# Altium PCB PCB2.PcbDoc
Units mm, origin at the board's own origin, x right, y up, seen from the top; angles counter-clockwise.
Board outline 100.58 x 66.29 mm, 4 copper layers (Top Layer, Int1 (GND), Int2 (PWR), Bottom Layer), stack 1.369 mm thick; 11 components, 2 nets, 24 pads, 2 vias.
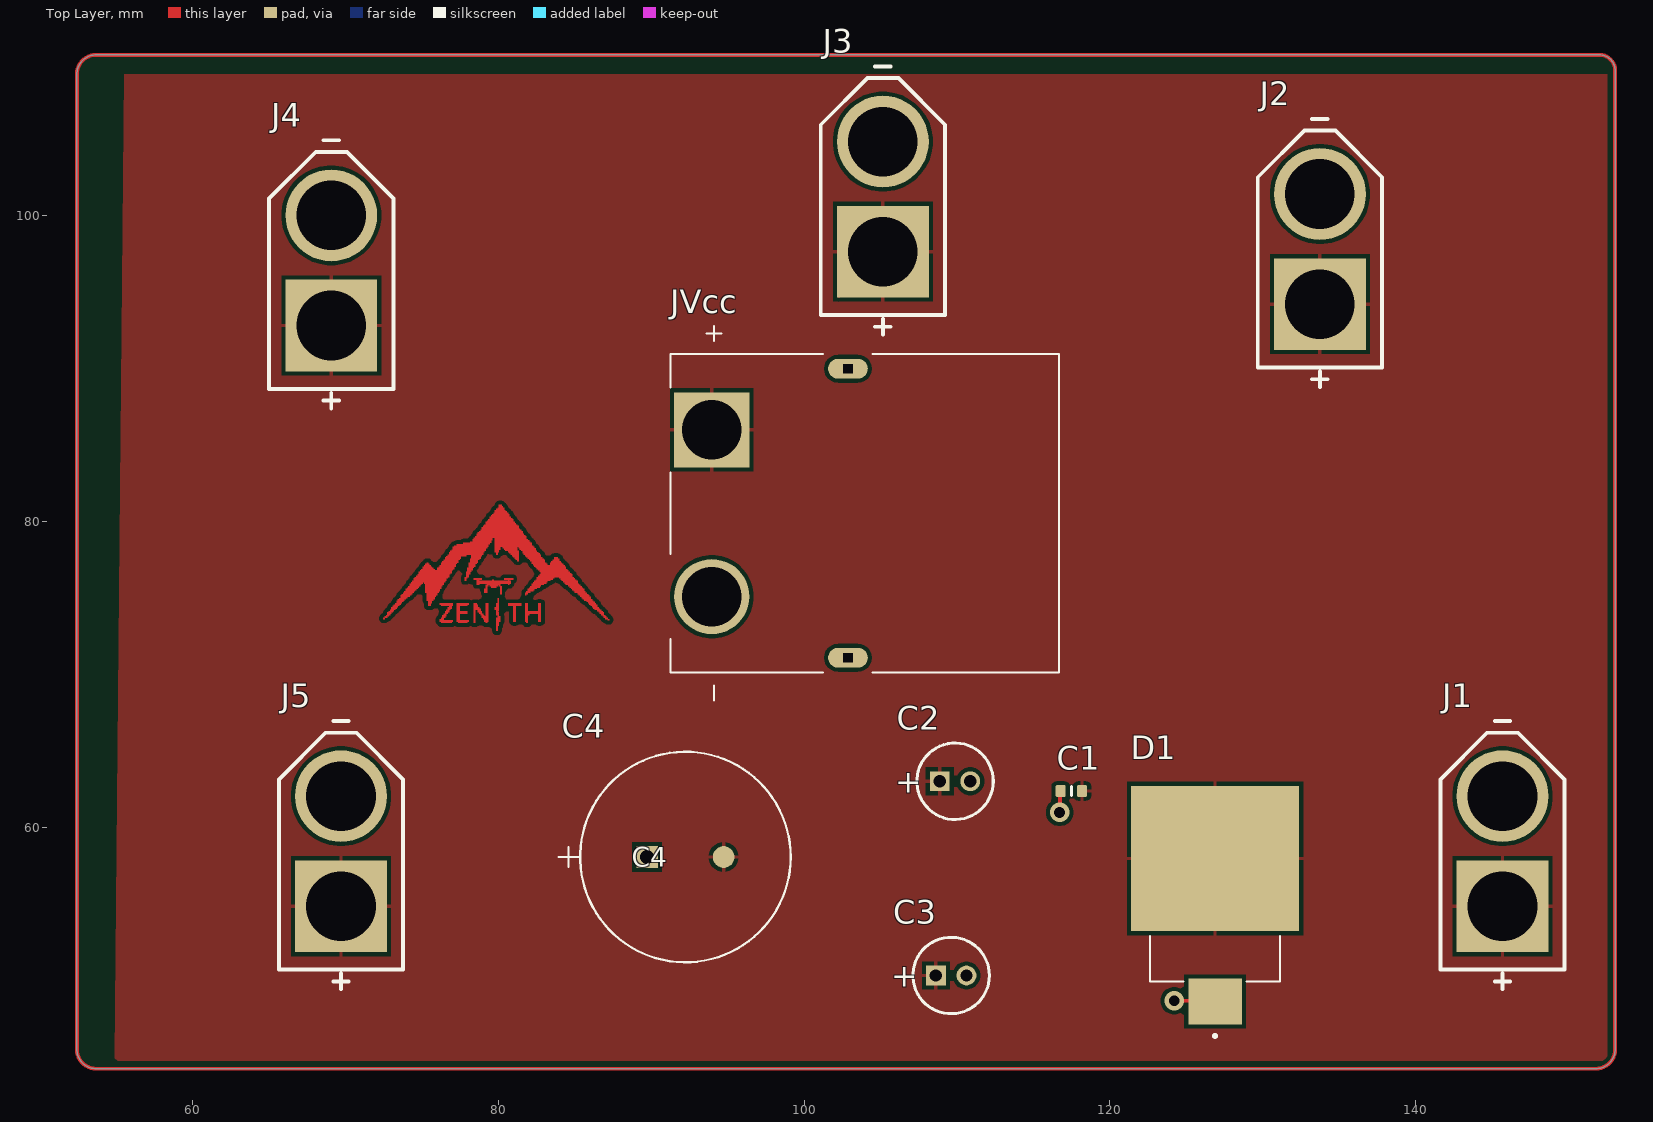
[diagram p0: Top Layer view]
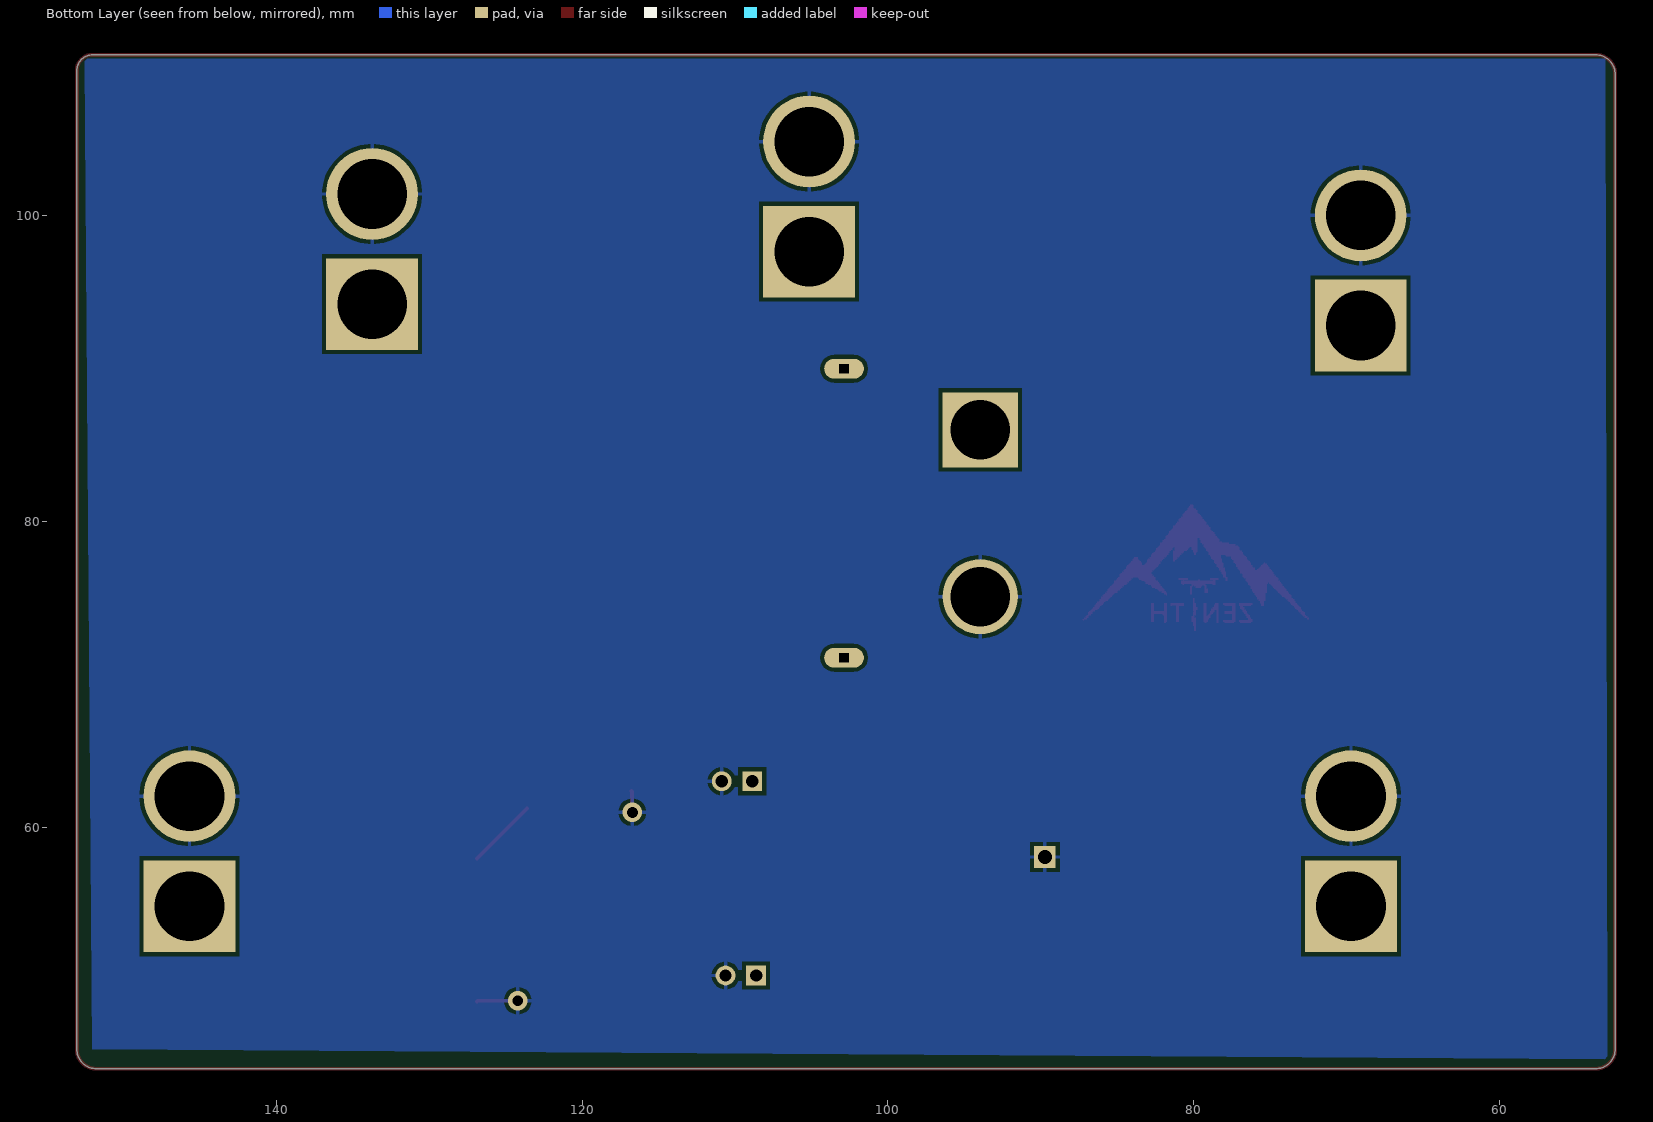
[diagram p1: Bottom Layer view, seen from below]
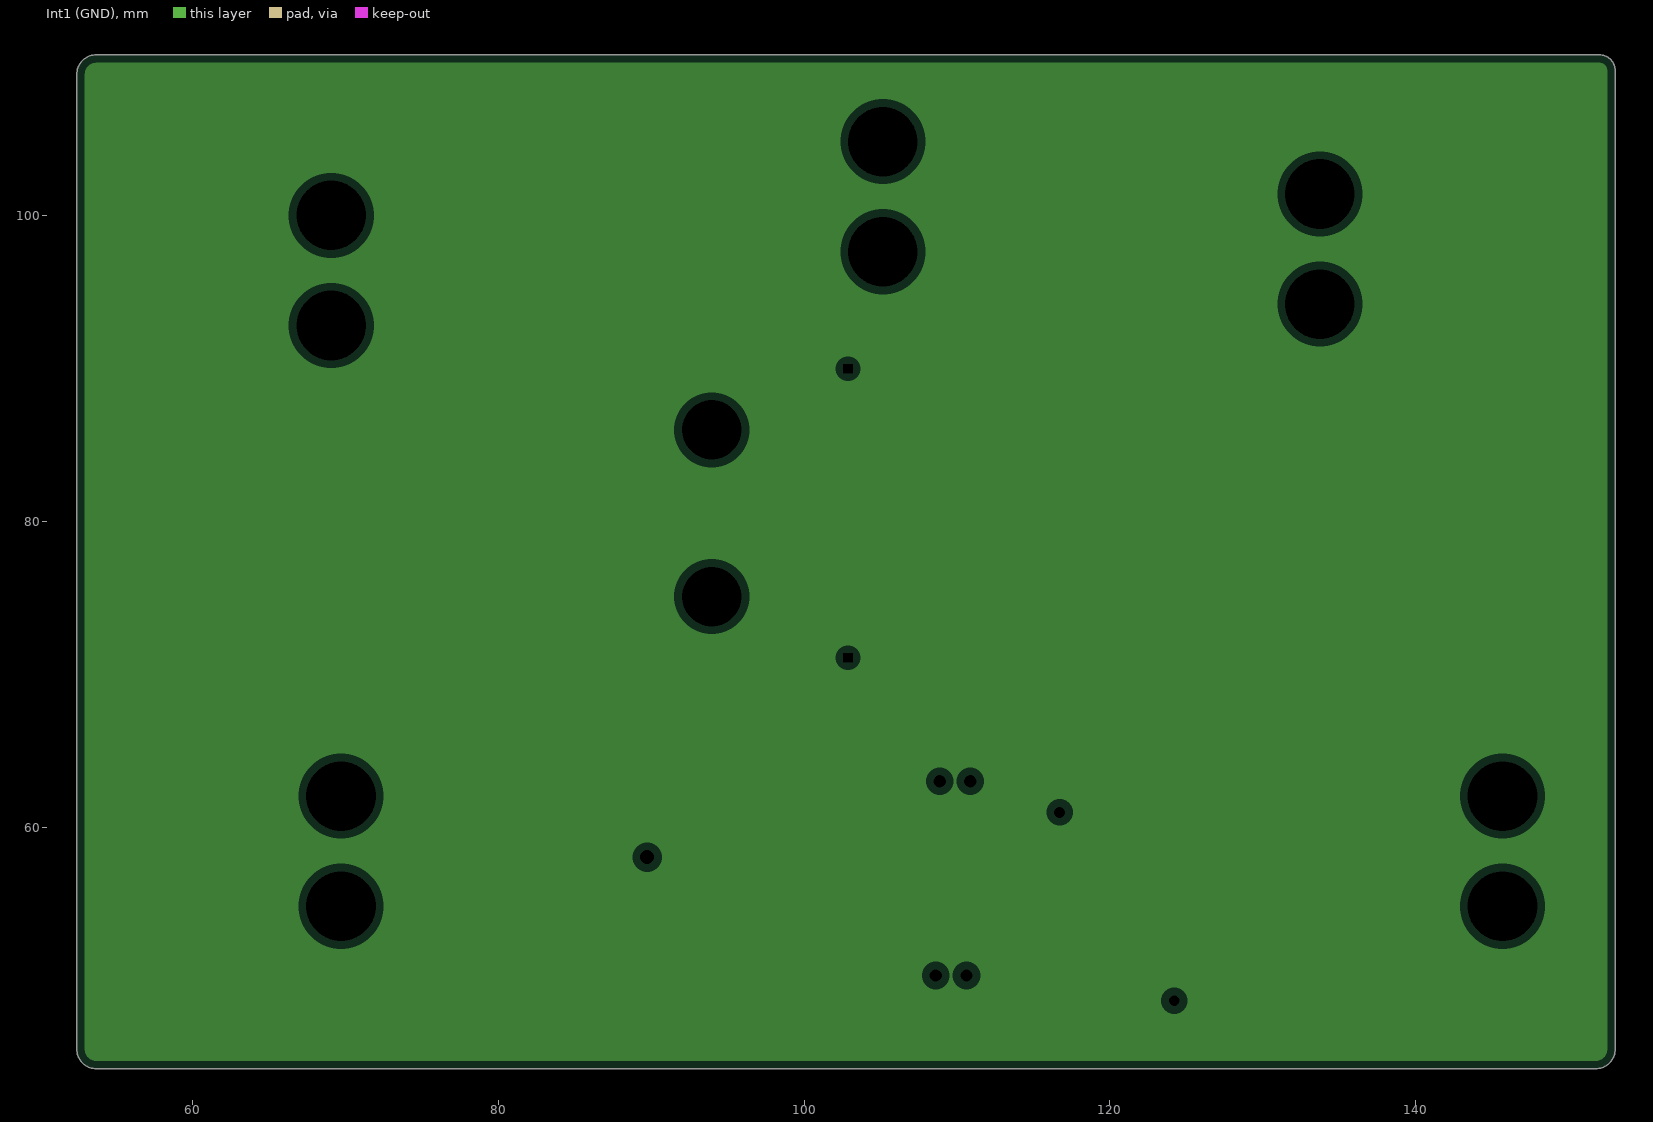
[diagram p2: Int1 (GND), clearances drawn from the general rule]
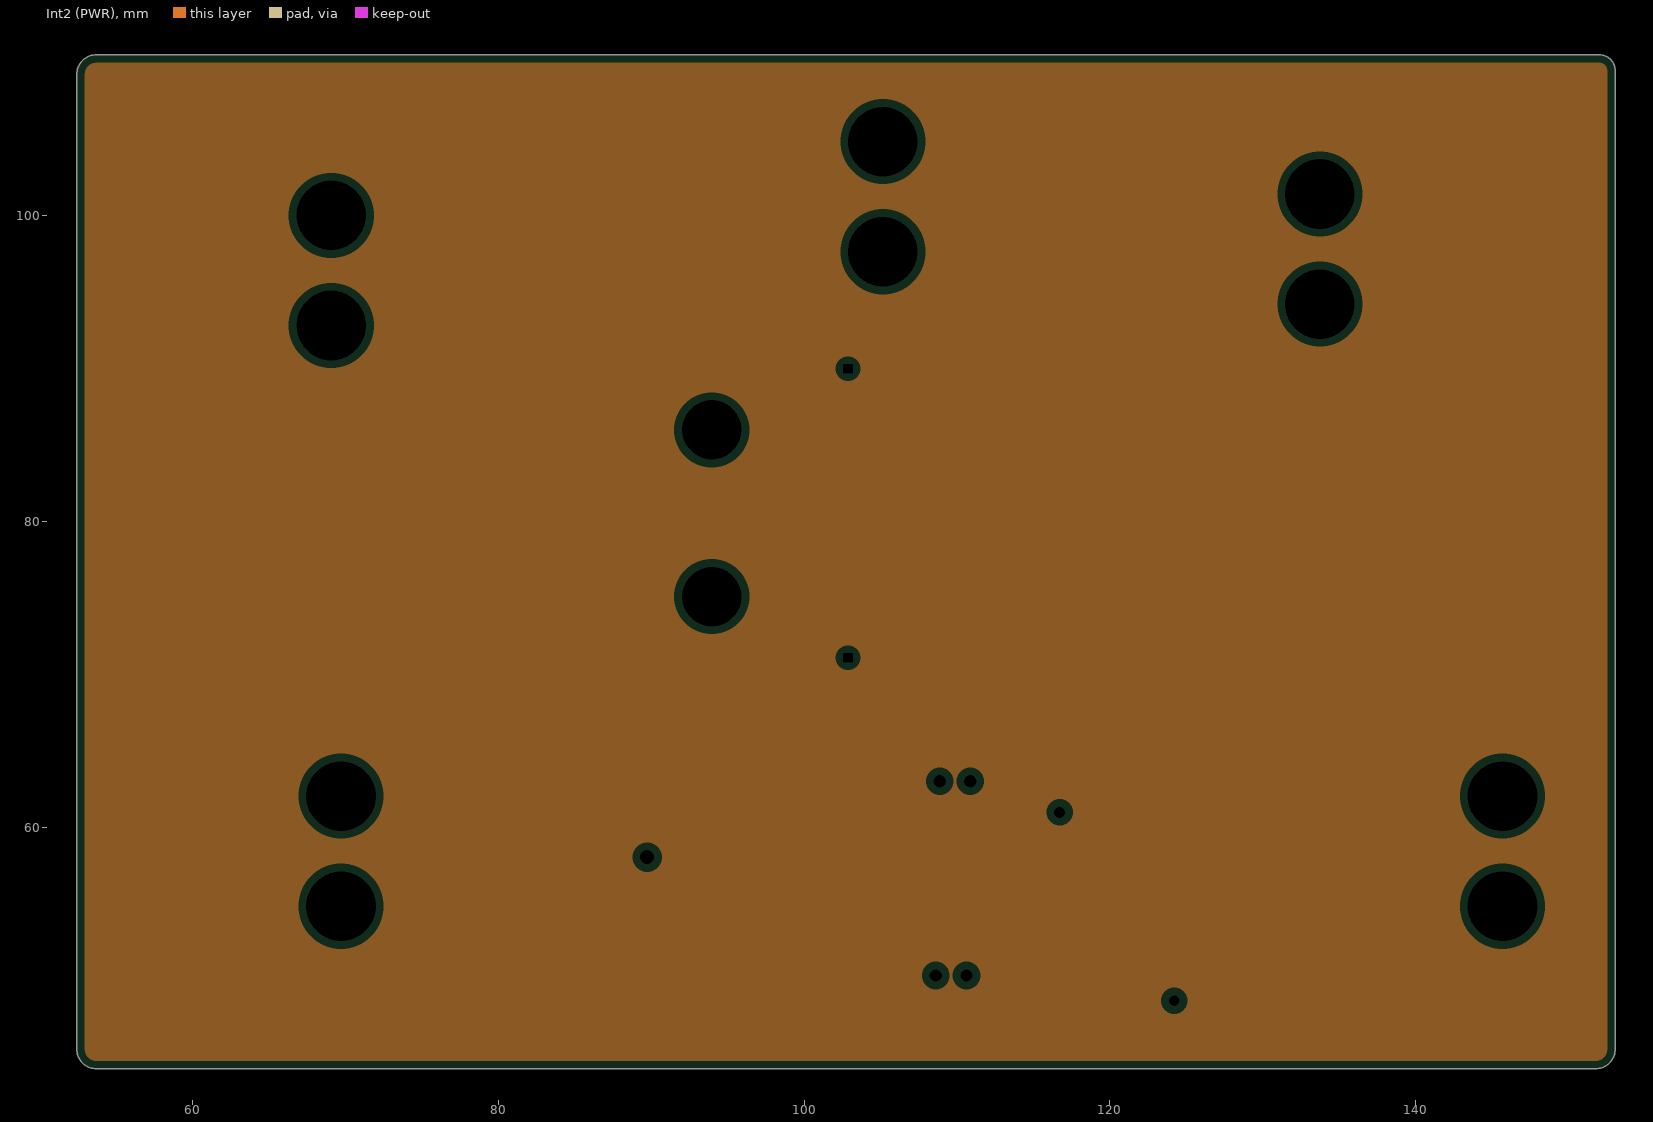
[diagram p3: Int2 (PWR), clearances drawn from the general rule]
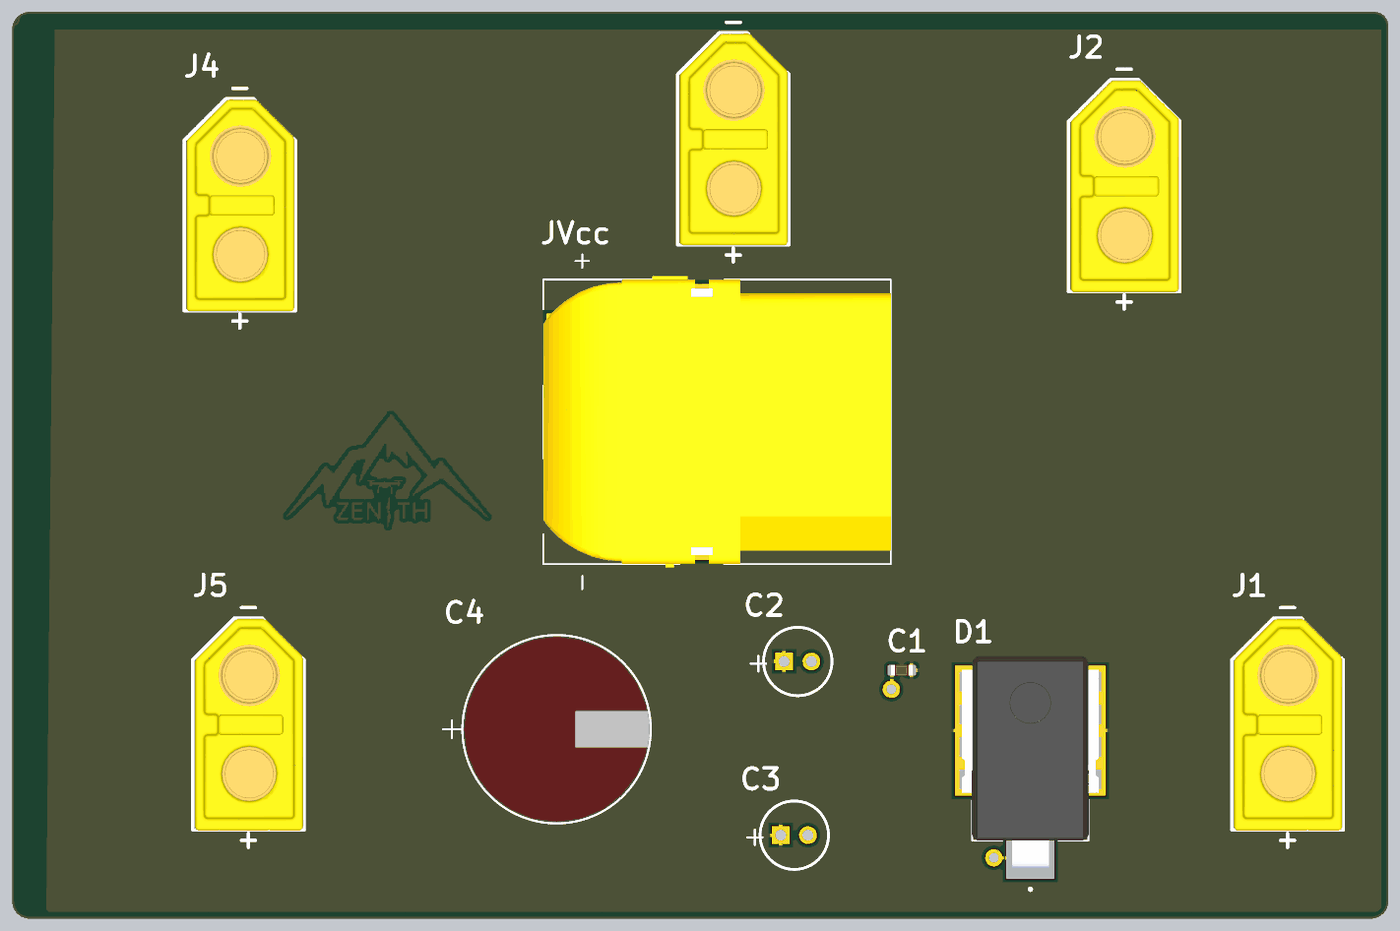
[diagram p4: 3D render of the assembled board from above, using the file's embedded part models]

## Layer stack, top to bottom
Top Solder: solder mask 0.0254, SM-001, Dk 4
Top Layer: signal copper 0.035
Dielectric 1: prepreg 0.1295, PP-017, Dk 4.3
Dielectric 2: prepreg 0.1295, PP-017, Dk 4.3
Int1 (GND): plane copper 0.035
Dielectric 3: core 0.7112, Core-039, Dk 4.8
Int2 (PWR): plane copper 0.035
Dielectric 4: prepreg 0.1295, PP-017, Dk 4.3
Dielectric 5: prepreg 0.1295, PP-017, Dk 4.3
Bottom Layer: signal copper 0.035
Bottom Solder: solder mask 0.0254, SM-001, Dk 4

## Board outline
52.451,45.466 52.451,109.22 cw(c53.721,109.22) 53.721,110.49 152.019,110.49 cw(c152.019,109.474) 153.035,109.474 153.035,45.466 cw(c151.765,45.466) 151.765,44.196 53.721,44.196 cw(c53.721,45.466)

## Design rules (kind name [scope] priority, off if disabled: settings)
Clearance [All] p1: gap=0.254 ignorepadtopadclearanceinfootprint=TRUE
PlaneClearance [All] p1: clearance=0.508
PlaneConnect [All] p1: planeconnectstyle=Relief reliefexpansion=0.508 reliefentries=4 reliefconductorwidth=0.254 reliefairgap=0.254
PolygonConnect [All] p1: connectstyle=Relief reliefconductorwidth=0.254 reliefentries=4 polygonreliefangle="90 Angle" airgapwidth=0.254
RoutingVias [All] p1: holewidth=0.711 width=1.27 viastyle="Through Hole" minholewidth=0.711 minwidth=1.27 maxholewidth=0.711 maxwidth=1.27
SolderMaskExpansion [All] p1: expansion=0.102 istentingtop=FALSE
SupplyNets "Schematic Supply Nets" [InNet('GND')] p1: voltage=0.000
Width [All] p1: maxlimit=0.254 minlimit=0.254 preferedwidth=0.254
28 further rules are at their usual default settings.

## Classes and differential pairs
component class PDB_OS3_connections: C1 C2 C3 D1 J1 J2 J3 J4 J5 JVcc

## Components (designator, comment, footprint, x,y, rotation, side; value= is the part's Value field where it differs from the comment)
C1 "Capacitor 1µF +/-40% 50V 0603" CAPC0603(1608)100_L 117.475,62.357 r0 top value=1µF
C2 "ECA1HM220" CAPPR55-200-1100X500X1200 109.871,62.992 r0 top value=22µF
C3 "ECA1HM220" CAPPR55-200-1100X500X1200 109.617,50.292 r0 top value=22µF
C4 "680 uF" CAP_PY-13x20_KEM 89.742,58.039 r0 top
D1 "58.1 V 2800 W" TVSP_TLD8S36AH 126.873,56.642 r90 top
J1 "XT60PB-F" XT60PB-F 145.669,58.42 r0 top
J2 "XT60PB-F" XT60PB-F 133.731,97.79 r0 top
J3 "XT60PB-F" XT60PB-F 105.156,101.219 r0 top
J4 "XT60PB-F" XT60PB-F 69.088,96.393 r0 top
J5 "XT60PB-F" XT60PB-F 69.723,58.42 r0 top
JVcc "XT90PW-F" AMASS_XT90PW-F 102.87,80.518 r90 top

## Footprints (in the part's own frame and the unit in brackets; to place one, negate y for a bottom-side part, rotate by r counter-clockwise, add the part's x,y. Pads: shape width x height; smd on the part's side, far side on the other; paste and mask are expansions set on the pad)
AMASS_XT90PW-F [mm]
  round 4.916 hole 3.9: N(-5.45,8.9)
  rect 4.916x4.916 / inner round 4.916 / far side rect 4.916x4.916 hole 3.9: P(5.45,8.9)
  oval 1.3x2.6 hole 0.6 square: S1(9.45,0) S2(-9.45,0)
  silkscreen extent -12.25,-13.8 12.25,11.6, body extent -10.65,-13.8 10.65,11.6, height 10.3
CAP_PY-13x20_KEM [mil]
  rect 56x56 hole 36 paste-99999 mask+0: 1(0,0)
  round 56 smd paste-99999 mask+0: 332(196.85,0)
  silkscreen extent -228,-271 369,271, body extent -168,-266 366,266, height 857
CAPC0603(1608)100_L [mm] "Chip Capacitor, Body 1.6x0.8mm, Height 1.0mm, IPC High Density"
  rrect25% 0.66x0.76 smd: 1(-0.7,0) 2(0.7,0)
  silkscreen extent 0,-0.3 0,0.3, body extent -0.8,-0.4 0.8,0.4, height 0.95
CAPPR55-200-1100X500X1200 [mm] "THD, 2-Leads, Dia 5mm, Pin Spacing 2mm"
  rect 1.3x1.3 hole 0.8: 1(-1,0)
  round 1.3 hole 0.8: 2(1,0)
  silkscreen extent -2.5,-2.5 2.5,2.5, body extent -2.5,-2.5 2.45,2.5, height 12
TVSP_TLD8S36AH [mm]
  rect 9.5x11 smd paste-7: A(1.3,0)
  rect 3x3.5 smd: C(-8.05,0)
  silkscreen extent -10.4,-4.25 -3.77,4.25, body extent -8.75,-5 6.75,5, height 5.5
XT60PB-F [mm] "Connector"
  round 6 hole 4.55: N(0,3.6)
  rect 6x6 / inner round 6 / far side rect 6x6 hole 4.55: P(0,-3.6)
  silkscreen extent -4.06,-9.02 4.06,8.51, body extent -3.9,-7.8 4,7.7, height 16.69

## Part data
C1: library part CMP-001-00078-4, "Chip Capacitor, 1µF +/-40%, 50V, 0603, Thickness 1 mm", Case/Package=0603, Max Operating Temperature=85°C, Min Operating Temperature=-55°C, Tolerance=10%, Voltage Rating=50V, Mounting Technology=SMT, Pins=2
C2 C3: library part CMP-001-00027-7, "Aluminum Electrolytic Capacitor, 22 uF, +/- 20%, 50 V, -40 to 85 degC, 2-Pin THD, RoHS, Bulk", Capacitor Type=Electrolytic, Case/Package=Radial, Manufacturer=Panasonic, Max Operating Temperature=85°C, Min Operating Temperature=-40°C, Package Description="2-Pin Radial Lead, Dia 5 mm, Height 12 mm", Package Quantity=200, Package Reference=CAPPR55-200-1100X500X1200, Ripple Current=100mA, Tolerance=20%, Voltage Rating=50V, Datasheet URL=https://industrial.panasonic.com/cdbs/www-data/pdf/RDF0000/ABA0000C1218.pdf, Datasheet Version="Rev. 05, 10/2016", Diameter=5mm, Lead Pitch=2mm, Manufacturer URL=http://www.panasonic.com/, Mounting Technology=TH, Packaging=Bulk, Pins=2, Ripple Current (AC)=100mA, RoHS Compliant=True
C4: library part CAP_PY-13x20_KEM, "680 uF Capacitor Through Hole", ComponentLink1Description="Manufacturer Link", ComponentLink1URL=https://www.digikey.ca/fr/products/detail/kemet/A759PY687M1HAAE026/6196519?s=N4IgjCBcoEwAwBYCcVQGMoDMCGAbAzgKYA0IA9lANogBsAHHAAQCtAYiALqkAOALlCACqAOwCWvAPKYAsoWz4ArgCdCIAL6l4AdhTQQGSDgIlyVEAFYmANU49%2BkIWMky5iletIBaGKn1ReSgomFJDU5pxqGiA%2BofrY3Nho4mRKEUA
D1: library part TVSP_TLD8S36AH, "Diode TVS 2800 W Unidirectionnelle", ComponentLink1Description="Manufacturer Link", ComponentLink1URL=https://www.digikey.ca/en/products/detail/taiwan-semiconductor-corporation/TLD5S36AH/9659228
J1 J2 J3 J4 J5: "Connector", ComponentLink1Description=Datasheet, ComponentLink1URL=https://www.tme.com/Document/aa7a0328674fda4109d00dc748bb5162/XT60UPB-F.pdf
JVcc: "Socket, DC supply, XT90, female, PIN:2, on PCBs, THT", Package=Package, Check_prices=https://www.snapeda.com/parts/XT90PW-F/AMASS/view-part/?ref=eda, MF=AMASS, MP=XT90PW-F, SnapEDA_Link=https://www.snapeda.com/parts/XT90PW-F/AMASS/view-part/?ref=snap

## Via types
v1: diameter 1.27, hole 0.711, Top Layer to Bottom Layer, 2 vias

## Nets (pads, with @x,y where several pads share a name; then routed paths per layer and width w, separated by ;. In a path a pad name is that pad's centre, name@x,y a point inside that pad or via, vN(x,y) a via of type N, cw(c..) or ccw(c..) an arc to the next point about the centre after c; other vN are vias at no path point)
GND: C1.1 C2.2 C3.2 C4.1 D1.C J1.N J2.N J3.N J4.N J5.N JVcc.N | length 4.4
  Top Layer w0.254: v1(116.713,60.96) 116.744,60.991 116.744,62.326 C1.1 ; v1(124.206,48.641) 126.824,48.641 D1.C
  Bottom Layer w0.254: J5.N J5.N@69.954,61.789
NetC1_2: C1.2 C2.1 C3.1 C4.332 D1.A J1.P J2.P J3.P J4.P J5.P JVcc.P | length 8.7
  Top Layer w0.254: J3.P@102.283,94.746 J3.P ; D1.A@123.601,61.214 D1.A
pads on no net: JVcc.S1 JVcc.S2
copper on no net: | length 331.7
  Top Layer w0.254: 52.451,45.466 ccw(c53.721,45.466) 53.721,44.196 151.765,44.196 ccw(c151.765,45.466) 153.035,45.466 153.035,109.474 ccw(c152.019,109.474) 152.019,110.49 72.39,110.49 53.721,110.49 ccw(c53.721,109.22) 52.451,109.22 52.451,45.466

## Polygon pours and split planes (outlines as drawn)
GND on Bottom Layer "GND Grid" (solid, pour order 1): 53.085,110.236 152.527,110.236 152.019,45.466 52.959,44.831
NetC1_2 on Top Layer "Power Grid" (solid, pour order 0): 55.561,109.22 152.527,109.22 152.527,44.704 54.943,44.704
no net on Int2 (PWR) (split plane): 53.721,109.98 152.019,109.98 152.031,109.981 152.118,109.972 152.213,109.943 152.301,109.896 152.378,109.833 152.441,109.756 152.488,109.668 152.517,109.573 152.526,109.486 152.525,109.474 152.525,45.466 152.526,45.453 152.517,45.347 152.49,45.231 152.444,45.12 152.381,45.018 152.304,44.927 152.213,44.85 152.111,44.787 152,44.741 151.884,44.714 151.778,44.705 151.765,44.706 53.721,44.706 53.708,44.705 53.602,44.714 53.486,44.741 53.375,44.787 53.273,44.85 53.182,44.927 53.105,45.018 53.042,45.12 52.996,45.231 52.969,45.347 52.96,45.453 52.961,45.466 52.961,109.22 52.96,109.233 52.969,109.339 52.996,109.455 53.042,109.566 53.105,109.668 53.182,109.759 53.273,109.836 53.375,109.899 53.486,109.945 53.602,109.972 53.708,109.981
no net on Int1 (GND) (split plane): 53.721,109.98 152.019,109.98 152.031,109.981 152.118,109.972 152.213,109.943 152.301,109.896 152.378,109.833 152.441,109.756 152.488,109.668 152.517,109.573 152.526,109.486 152.525,109.474 152.525,45.466 152.526,45.453 152.517,45.347 152.49,45.231 152.444,45.12 152.381,45.018 152.304,44.927 152.213,44.85 152.111,44.787 152,44.741 151.884,44.714 151.778,44.705 151.765,44.706 53.721,44.706 53.708,44.705 53.602,44.714 53.486,44.741 53.375,44.787 53.273,44.85 53.182,44.927 53.105,45.018 53.042,45.12 52.996,45.231 52.969,45.347 52.96,45.453 52.961,45.466 52.961,109.22 52.96,109.233 52.969,109.339 52.996,109.455 53.042,109.566 53.105,109.668 53.182,109.759 53.273,109.836 53.375,109.899 53.486,109.945 53.602,109.972 53.708,109.981

## Other copper
Top Layer:
  region: 72.499,73.685 72.585,73.685 72.585,73.6 72.499,73.6
  region: 87.168,73.514 87.168,73.6 87.254,73.6 87.254,73.514
  region: 82.793,73.6 82.793,73.428 82.621,73.428 82.621,73.943 82.021,73.943 82.021,73.857 81.935,73.857 81.935,73.342 81.849,73.342 81.849,73.428 81.764,73.428 81.764,74.629 81.935,74.629 81.935,74.114 82.621,74.114 82.621,74.629 82.793,74.629 82.793,73.685
  region: 76.445,73.514 77.045,73.514 77.045,73.428 76.96,73.428 76.96,73.342 76.273,73.342 76.273,73.428 76.188,73.428 76.188,73.6 76.273,73.6 76.273,73.685 76.359,73.685 76.359,73.857 76.445,73.857 76.445,73.943 76.531,73.943 76.531,74.114 76.616,74.114 76.616,74.2 76.702,74.2 76.702,74.372 76.788,74.372 76.788,74.457 76.273,74.457 76.273,74.543 76.188,74.543 76.188,74.629 77.045,74.629 77.045,74.457 76.96,74.457 76.96,74.286 76.874,74.286 76.874,74.2 76.788,74.2 76.788,74.029 76.702,74.029 76.702,73.943 76.616,73.943 76.616,73.771 76.531,73.771 76.531,73.685 76.445,73.685 76.445,73.6
  region: 81.42,74.457 81.163,74.457 81.163,73.428 80.991,73.428 80.991,74.457 80.648,74.457 80.648,74.629 81.506,74.629 81.506,74.457
  region: 80.648,75.83 80.648,75.916 80.134,75.916 80.134,75.744 80.048,75.744 80.048,75.83 79.962,75.83 79.962,75.744 79.876,75.744 79.876,75.658 79.533,75.658 79.533,75.744 79.447,75.744 79.447,75.83 79.362,75.83 79.362,75.744 79.276,75.744 79.276,75.315 79.104,75.315 79.104,75.573 79.19,75.573 79.19,75.83 79.276,75.83 79.276,75.916 78.761,75.916 78.761,75.83 78.59,75.83 78.59,76.173 78.418,76.173 78.418,76.259 78.933,76.259 78.933,76.173 78.761,76.173 78.761,76.087 79.619,76.087 79.619,76.173 79.705,76.173 79.705,76.087 80.648,76.087 80.648,76.173 80.391,76.173 80.391,76.259 80.991,76.259 80.991,76.173 80.734,76.173 80.734,76.087 80.82,76.087 80.82,75.916 80.734,75.916 80.734,75.83
  region: 79.962,73.171 79.962,72.828 79.876,72.828 79.876,73.685 79.962,73.685 79.962,73.857 79.876,73.857 79.876,74.2 79.791,74.2 79.791,74.372 79.876,74.372 79.876,74.629 79.962,74.629 79.962,74.972 80.048,74.972 80.048,74.114 79.962,74.114 79.962,74.029 80.048,74.029 80.048,73.771 80.134,73.771 80.134,73.428 80.048,73.428 80.048,73.171
  region: 80.134,75.401 80.134,75.744 80.219,75.744 80.219,75.23 80.134,75.23 80.134,75.315
  region: 669 vertices and 0 holes, not listed, extent 72.585,73.6 87.168,81.063
  region: 77.732,74.114 77.989,74.114 77.989,73.943 77.474,73.943 77.474,73.514 78.075,73.514 78.075,73.428 77.989,73.428 77.989,73.342 77.389,73.342 77.389,73.428 77.303,73.428 77.303,74.629 78.075,74.629 78.075,74.543 77.989,74.543 77.989,74.457 77.474,74.457 77.474,74.114 77.646,74.114
  region: 79.104,73.771 79.19,73.771 79.19,74.629 79.362,74.629 79.362,73.428 79.276,73.428 79.276,73.342 79.19,73.342 79.19,73.428 79.104,73.428 79.104,73.6 79.018,73.6 79.018,73.685 78.933,73.685 78.933,73.857 78.847,73.857 78.847,73.943 78.761,73.943 78.761,74.029 78.675,74.029 78.675,74.2 78.504,74.2 78.504,73.342 78.418,73.342 78.418,74.629 78.59,74.629 78.59,74.543 78.675,74.543 78.675,74.372 78.761,74.372 78.761,74.286 78.847,74.286 78.847,74.114 78.933,74.114 78.933,73.943 79.018,73.943 79.018,73.857 79.104,73.857

## Dimensions
49.276,110.236 to 49.276,59.944 on Top Layer
52.07,114.935 to 112.522,115.57 on Top Layer

## Text inside footprints (layer, text, board x,y; h text height)
C2: Top Overlay "+" at 105.963,62.255 h1.5
C3: Top Overlay "+" at 105.709,49.555 h1.5